# EAGLE board vykObv_pan (EAGLE 7.2.0), part 1 of 2
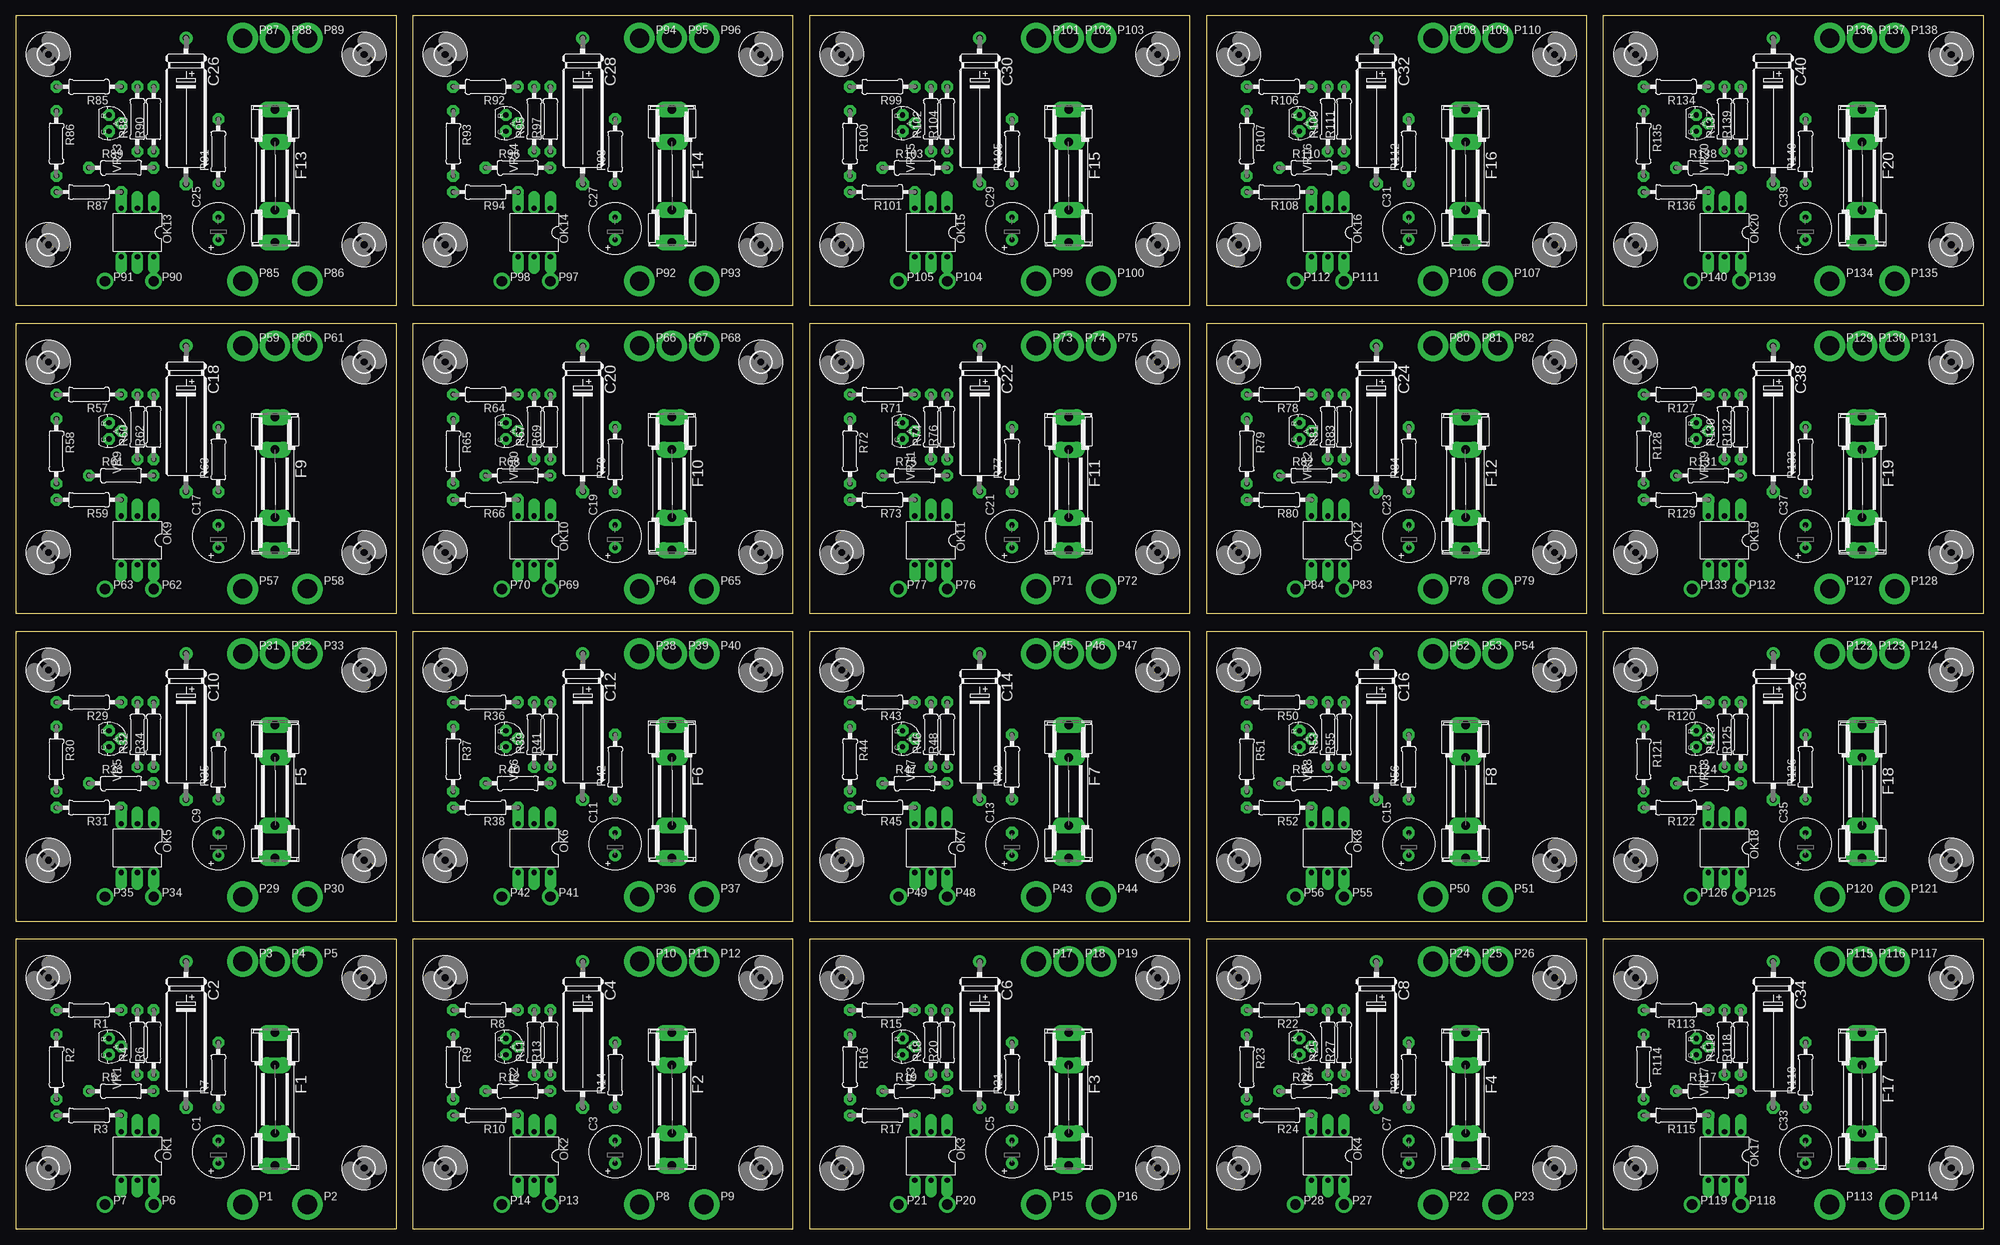
[diagram p0: board, top side]
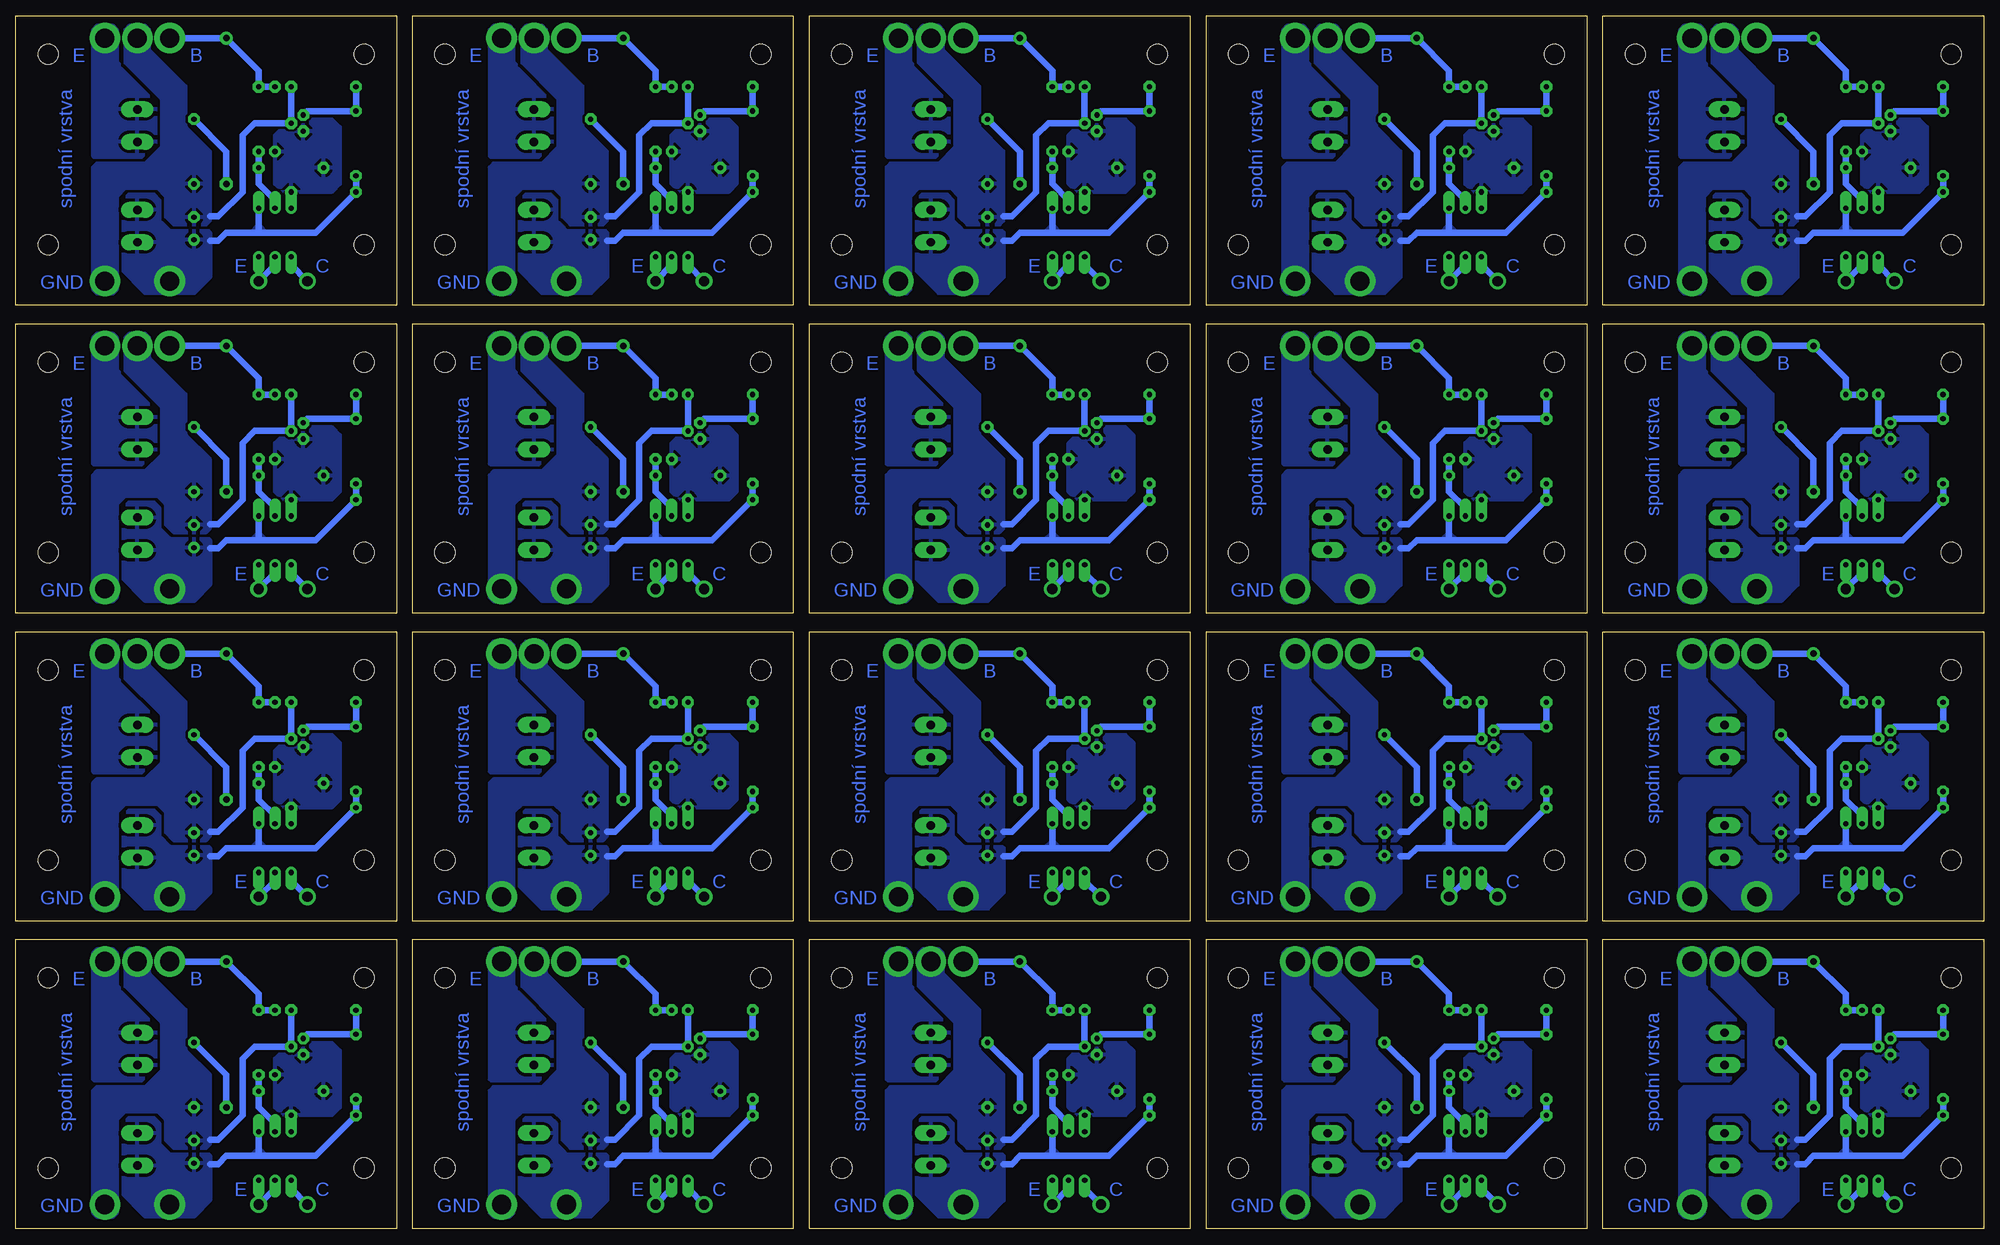
[diagram p1: board, bottom side, seen from below]

Size 308.59 x 190.17 mm. Coordinates in mm from the lower left corner, seen from the top.
Outline: 0,0 59.67,0 59.67,45.39 0,45.39 0,0
Outline: 62.23,0 121.9,0 121.9,45.39 62.23,45.39 62.23,0
Outline: 124.46,0 184.13,0 184.13,45.39 124.46,45.39 124.46,0
Outline: 186.69,0 246.36,0 246.36,45.39 186.69,45.39 186.69,0
Outline: 0,48.26 59.67,48.26 59.67,93.65 0,93.65 0,48.26
Outline: 62.23,48.26 121.9,48.26 121.9,93.65 62.23,93.65 62.23,48.26
Outline: 124.46,48.26 184.13,48.26 184.13,93.65 124.46,93.65 124.46,48.26
Outline: 186.69,48.26 246.36,48.26 246.36,93.65 186.69,93.65 186.69,48.26
Outline: 0,96.52 59.67,96.52 59.67,141.91 0,141.91 0,96.52
Outline: 62.23,96.52 121.9,96.52 121.9,141.91 62.23,141.91 62.23,96.52
Outline: 124.46,96.52 184.13,96.52 184.13,141.91 124.46,141.91 124.46,96.52
Outline: 186.69,96.52 246.36,96.52 246.36,141.91 186.69,141.91 186.69,96.52
Outline: 0,144.78 59.67,144.78 59.67,190.17 0,190.17 0,144.78
Outline: 62.23,144.78 121.9,144.78 121.9,190.17 62.23,190.17 62.23,144.78
Outline: 124.46,144.78 184.13,144.78 184.13,190.17 124.46,190.17 124.46,144.78
Outline: 186.69,144.78 246.36,144.78 246.36,190.17 186.69,190.17 186.69,144.78
Outline: 248.92,0 308.59,0 308.59,45.39 248.92,45.39 248.92,0
Outline: 248.92,48.26 308.59,48.26 308.59,93.65 248.92,93.65 248.92,48.26
Outline: 248.92,96.52 308.59,96.52 308.59,141.91 248.92,141.91 248.92,96.52
Outline: 248.92,144.78 308.59,144.78 308.59,190.17 248.92,190.17 248.92,144.78
Copper layers (1*16): Top 0.035mm / dielectric 1.5mm / Bottom 0.035mm
Design rules "designRules": minimum track width 10mil, minimum drill 24mil, track to track 16mil, track to pad 10mil, pad to pad 8mil, via to via 8mil, smd to smd 8mil, copper to edge 20mil, drill to drill 8mil, minimum pad ring 20mil, minimum via ring 8mil, stop-mask expansion 4mil, vias tented up to drill 0mil, thermal gap 20mil

## Footprints (pad centres in the part's own frame; a part is rotated, then mirrored left to right if it is on the bottom)
E3,5-8 = drill 0.813 pad 1.6: + -1.778,0 | drill 0.813 pad 1.6 octagon: - 1.778,0
E22-6 = drill 1.016: + -11.43,0 | drill 1.016 octagon: - 11.43,0
SHK20L = drill 1.321 pad 2.54 long: 1A -10.414,0; 1B -5.334,0; 2A 10.414,0; 2B 5.334,0
DIL06 = drill 0.813 offset: 1 -2.54,-3.81; 2 0,-3.81; 3 2.54,-3.81; 4 2.54,3.81; 5 0,3.81; 6 -2.54,3.81
PAD3MM = drill 3 pad 4: 1 0,0
PAD1.6MM = drill 1.6: P$1 0,0
0207/10 = drill 0.813 octagon: 1 -5.08,0; 2 5.08,0
3,2 = hole 3.2: 0,0
TO92-CLP = drill 0.813 octagon: A 0,1.905; C 1.27,0; R -1.27,0

## Placement (x,y rotation side)
C1  220M  [E3,5-8]  31.75,12.06 90 top
C2  10M  [E22-6]  26.67,30.48 270 top
C3  220M  [E3,5-8]  93.98,12.06 90 top
C4  10M  [E22-6]  88.9,30.48 270 top
C5  220M  [E3,5-8]  156.21,12.06 90 top
C6  10M  [E22-6]  151.13,30.48 270 top
C7  220M  [E3,5-8]  218.44,12.06 90 top
C8  10M  [E22-6]  213.36,30.48 270 top
C9  220M  [E3,5-8]  31.75,60.33 90 top
C10  10M  [E22-6]  26.67,78.74 270 top
C11  220M  [E3,5-8]  93.98,60.33 90 top
C12  10M  [E22-6]  88.9,78.74 270 top
C13  220M  [E3,5-8]  156.21,60.33 90 top
C14  10M  [E22-6]  151.13,78.74 270 top
C15  220M  [E3,5-8]  218.44,60.33 90 top
C16  10M  [E22-6]  213.36,78.74 270 top
C17  220M  [E3,5-8]  31.75,108.58 90 top
C18  10M  [E22-6]  26.67,127 270 top
C19  220M  [E3,5-8]  93.98,108.58 90 top
C20  10M  [E22-6]  88.9,127 270 top
C21  220M  [E3,5-8]  156.21,108.58 90 top
C22  10M  [E22-6]  151.13,127 270 top
C23  220M  [E3,5-8]  218.44,108.58 90 top
C24  10M  [E22-6]  213.36,127 270 top
C25  220M  [E3,5-8]  31.75,156.84 90 top
C26  10M  [E22-6]  26.67,175.26 270 top
C27  220M  [E3,5-8]  93.98,156.84 90 top
C28  10M  [E22-6]  88.9,175.26 270 top
C29  220M  [E3,5-8]  156.21,156.84 90 top
C30  10M  [E22-6]  151.13,175.26 270 top
C31  220M  [E3,5-8]  218.44,156.84 90 top
C32  10M  [E22-6]  213.36,175.26 270 top
C33  220M  [E3,5-8]  280.67,12.06 90 top
C34  10M  [E22-6]  275.59,30.48 270 top
C35  220M  [E3,5-8]  280.67,60.33 90 top
C36  10M  [E22-6]  275.59,78.74 270 top
C37  220M  [E3,5-8]  280.67,108.58 90 top
C38  10M  [E22-6]  275.59,127 270 top
C39  220M  [E3,5-8]  280.67,156.84 90 top
C40  10M  [E22-6]  275.59,175.26 270 top
F1  FUSESHK20L  [SHK20L]  40.64,20.32 270 top
F2  FUSESHK20L  [SHK20L]  102.87,20.32 270 top
F3  FUSESHK20L  [SHK20L]  165.1,20.32 270 top
F4  FUSESHK20L  [SHK20L]  227.33,20.32 270 top
F5  FUSESHK20L  [SHK20L]  40.64,68.58 270 top
F6  FUSESHK20L  [SHK20L]  102.87,68.58 270 top
F7  FUSESHK20L  [SHK20L]  165.1,68.58 270 top
F8  FUSESHK20L  [SHK20L]  227.33,68.58 270 top
F9  FUSESHK20L  [SHK20L]  40.64,116.84 270 top
F10  FUSESHK20L  [SHK20L]  102.87,116.84 270 top
F11  FUSESHK20L  [SHK20L]  165.1,116.84 270 top
F12  FUSESHK20L  [SHK20L]  227.33,116.84 270 top
F13  FUSESHK20L  [SHK20L]  40.64,165.1 270 top
F14  FUSESHK20L  [SHK20L]  102.87,165.1 270 top
F15  FUSESHK20L  [SHK20L]  165.1,165.1 270 top
F16  FUSESHK20L  [SHK20L]  227.33,165.1 270 top
F17  FUSESHK20L  [SHK20L]  289.56,20.32 270 top
F18  FUSESHK20L  [SHK20L]  289.56,68.58 270 top
F19  FUSESHK20L  [SHK20L]  289.56,116.84 270 top
F20  FUSESHK20L  [SHK20L]  289.56,165.1 270 top
OK1  4N35  [DIL06]  19.05,11.43 180 top
OK2  4N35  [DIL06]  81.28,11.43 180 top
OK3  4N35  [DIL06]  143.51,11.43 180 top
OK4  4N35  [DIL06]  205.74,11.43 180 top
OK5  4N35  [DIL06]  19.05,59.69 180 top
OK6  4N35  [DIL06]  81.28,59.69 180 top
OK7  4N35  [DIL06]  143.51,59.69 180 top
OK8  4N35  [DIL06]  205.74,59.69 180 top
OK9  4N35  [DIL06]  19.05,107.95 180 top
OK10  4N35  [DIL06]  81.28,107.95 180 top
OK11  4N35  [DIL06]  143.51,107.95 180 top
OK12  4N35  [DIL06]  205.74,107.95 180 top
OK13  4N35  [DIL06]  19.05,156.21 180 top
OK14  4N35  [DIL06]  81.28,156.21 180 top
OK15  4N35  [DIL06]  143.51,156.21 180 top
OK16  4N35  [DIL06]  205.74,156.21 180 top
OK17  4N35  [DIL06]  267.97,11.43 180 top
OK18  4N35  [DIL06]  267.97,59.69 180 top
OK19  4N35  [DIL06]  267.97,107.95 180 top
OK20  4N35  [DIL06]  267.97,156.21 180 top
P1  VCC  [PAD3MM]  35.56,3.81 0 top
P2  GND  [PAD3MM]  45.72,3.81 0 top
P3  B  [PAD3MM]  35.56,41.91 0 top
P4  C  [PAD3MM]  40.64,41.91 0 top
P5  E  [PAD3MM]  45.72,41.91 0 top
P6  X4  [PAD1.6MM]  21.59,3.81 0 top
P7  X3  [PAD1.6MM]  13.97,3.81 0 top
P8  VCC  [PAD3MM]  97.79,3.81 0 top
P9  GND  [PAD3MM]  107.95,3.81 0 top
P10  B  [PAD3MM]  97.79,41.91 0 top
P11  C  [PAD3MM]  102.87,41.91 0 top
P12  E  [PAD3MM]  107.95,41.91 0 top
P13  X4  [PAD1.6MM]  83.82,3.81 0 top
P14  X3  [PAD1.6MM]  76.2,3.81 0 top
P15  VCC  [PAD3MM]  160.02,3.81 0 top
P16  GND  [PAD3MM]  170.18,3.81 0 top
P17  B  [PAD3MM]  160.02,41.91 0 top
P18  C  [PAD3MM]  165.1,41.91 0 top
P19  E  [PAD3MM]  170.18,41.91 0 top
P20  X4  [PAD1.6MM]  146.05,3.81 0 top
P21  X3  [PAD1.6MM]  138.43,3.81 0 top
P22  VCC  [PAD3MM]  222.25,3.81 0 top
P23  GND  [PAD3MM]  232.41,3.81 0 top
P24  B  [PAD3MM]  222.25,41.91 0 top
P25  C  [PAD3MM]  227.33,41.91 0 top
P26  E  [PAD3MM]  232.41,41.91 0 top
P27  X4  [PAD1.6MM]  208.28,3.81 0 top
P28  X3  [PAD1.6MM]  200.66,3.81 0 top
P29  VCC  [PAD3MM]  35.56,52.07 0 top
P30  GND  [PAD3MM]  45.72,52.07 0 top
P31  B  [PAD3MM]  35.56,90.17 0 top
P32  C  [PAD3MM]  40.64,90.17 0 top
P33  E  [PAD3MM]  45.72,90.17 0 top
P34  X4  [PAD1.6MM]  21.59,52.07 0 top
P35  X3  [PAD1.6MM]  13.97,52.07 0 top
P36  VCC  [PAD3MM]  97.79,52.07 0 top
P37  GND  [PAD3MM]  107.95,52.07 0 top
P38  B  [PAD3MM]  97.79,90.17 0 top
P39  C  [PAD3MM]  102.87,90.17 0 top
P40  E  [PAD3MM]  107.95,90.17 0 top
P41  X4  [PAD1.6MM]  83.82,52.07 0 top
P42  X3  [PAD1.6MM]  76.2,52.07 0 top
P43  VCC  [PAD3MM]  160.02,52.07 0 top
P44  GND  [PAD3MM]  170.18,52.07 0 top
P45  B  [PAD3MM]  160.02,90.17 0 top
P46  C  [PAD3MM]  165.1,90.17 0 top
P47  E  [PAD3MM]  170.18,90.17 0 top
P48  X4  [PAD1.6MM]  146.05,52.07 0 top
P49  X3  [PAD1.6MM]  138.43,52.07 0 top
P50  VCC  [PAD3MM]  222.25,52.07 0 top
P51  GND  [PAD3MM]  232.41,52.07 0 top
P52  B  [PAD3MM]  222.25,90.17 0 top
P53  C  [PAD3MM]  227.33,90.17 0 top
P54  E  [PAD3MM]  232.41,90.17 0 top
P55  X4  [PAD1.6MM]  208.28,52.07 0 top
P56  X3  [PAD1.6MM]  200.66,52.07 0 top
P57  VCC  [PAD3MM]  35.56,100.33 0 top
P58  GND  [PAD3MM]  45.72,100.33 0 top
P59  B  [PAD3MM]  35.56,138.43 0 top
P60  C  [PAD3MM]  40.64,138.43 0 top
P61  E  [PAD3MM]  45.72,138.43 0 top
P62  X4  [PAD1.6MM]  21.59,100.33 0 top
P63  X3  [PAD1.6MM]  13.97,100.33 0 top
P64  VCC  [PAD3MM]  97.79,100.33 0 top
P65  GND  [PAD3MM]  107.95,100.33 0 top
P66  B  [PAD3MM]  97.79,138.43 0 top
P67  C  [PAD3MM]  102.87,138.43 0 top
P68  E  [PAD3MM]  107.95,138.43 0 top
P69  X4  [PAD1.6MM]  83.82,100.33 0 top
P70  X3  [PAD1.6MM]  76.2,100.33 0 top
P71  VCC  [PAD3MM]  160.02,100.33 0 top
P72  GND  [PAD3MM]  170.18,100.33 0 top
P73  B  [PAD3MM]  160.02,138.43 0 top
P74  C  [PAD3MM]  165.1,138.43 0 top
P75  E  [PAD3MM]  170.18,138.43 0 top
P76  X4  [PAD1.6MM]  146.05,100.33 0 top
P77  X3  [PAD1.6MM]  138.43,100.33 0 top
P78  VCC  [PAD3MM]  222.25,100.33 0 top
P79  GND  [PAD3MM]  232.41,100.33 0 top
P80  B  [PAD3MM]  222.25,138.43 0 top
P81  C  [PAD3MM]  227.33,138.43 0 top
P82  E  [PAD3MM]  232.41,138.43 0 top
P83  X4  [PAD1.6MM]  208.28,100.33 0 top
P84  X3  [PAD1.6MM]  200.66,100.33 0 top
P85  VCC  [PAD3MM]  35.56,148.59 0 top
P86  GND  [PAD3MM]  45.72,148.59 0 top
P87  B  [PAD3MM]  35.56,186.69 0 top
P88  C  [PAD3MM]  40.64,186.69 0 top
P89  E  [PAD3MM]  45.72,186.69 0 top
P90  X4  [PAD1.6MM]  21.59,148.59 0 top
P91  X3  [PAD1.6MM]  13.97,148.59 0 top
P92  VCC  [PAD3MM]  97.79,148.59 0 top
P93  GND  [PAD3MM]  107.95,148.59 0 top
P94  B  [PAD3MM]  97.79,186.69 0 top
P95  C  [PAD3MM]  102.87,186.69 0 top
P96  E  [PAD3MM]  107.95,186.69 0 top
P97  X4  [PAD1.6MM]  83.82,148.59 0 top
P98  X3  [PAD1.6MM]  76.2,148.59 0 top
P99  VCC  [PAD3MM]  160.02,148.59 0 top
P100  GND  [PAD3MM]  170.18,148.59 0 top
P101  B  [PAD3MM]  160.02,186.69 0 top
P102  C  [PAD3MM]  165.1,186.69 0 top
P103  E  [PAD3MM]  170.18,186.69 0 top
P104  X4  [PAD1.6MM]  146.05,148.59 0 top
P105  X3  [PAD1.6MM]  138.43,148.59 0 top
P106  VCC  [PAD3MM]  222.25,148.59 0 top
P107  GND  [PAD3MM]  232.41,148.59 0 top
P108  B  [PAD3MM]  222.25,186.69 0 top
P109  C  [PAD3MM]  227.33,186.69 0 top
P110  E  [PAD3MM]  232.41,186.69 0 top
P111  X4  [PAD1.6MM]  208.28,148.59 0 top
P112  X3  [PAD1.6MM]  200.66,148.59 0 top
P113  VCC  [PAD3MM]  284.48,3.81 0 top
P114  GND  [PAD3MM]  294.64,3.81 0 top
P115  B  [PAD3MM]  284.48,41.91 0 top
P116  C  [PAD3MM]  289.56,41.91 0 top
P117  E  [PAD3MM]  294.64,41.91 0 top
P118  X4  [PAD1.6MM]  270.51,3.81 0 top
P119  X3  [PAD1.6MM]  262.89,3.81 0 top
P120  VCC  [PAD3MM]  284.48,52.07 0 top
P121  GND  [PAD3MM]  294.64,52.07 0 top
P122  B  [PAD3MM]  284.48,90.17 0 top
P123  C  [PAD3MM]  289.56,90.17 0 top
P124  E  [PAD3MM]  294.64,90.17 0 top
P125  X4  [PAD1.6MM]  270.51,52.07 0 top
P126  X3  [PAD1.6MM]  262.89,52.07 0 top
P127  VCC  [PAD3MM]  284.48,100.33 0 top
P128  GND  [PAD3MM]  294.64,100.33 0 top
P129  B  [PAD3MM]  284.48,138.43 0 top
P130  C  [PAD3MM]  289.56,138.43 0 top
P131  E  [PAD3MM]  294.64,138.43 0 top
P132  X4  [PAD1.6MM]  270.51,100.33 0 top
P133  X3  [PAD1.6MM]  262.89,100.33 0 top
P134  VCC  [PAD3MM]  284.48,148.59 0 top
P135  GND  [PAD3MM]  294.64,148.59 0 top
P136  B  [PAD3MM]  284.48,186.69 0 top
P137  C  [PAD3MM]  289.56,186.69 0 top
P138  E  [PAD3MM]  294.64,186.69 0 top
P139  X4  [PAD1.6MM]  270.51,148.59 0 top
P140  X3  [PAD1.6MM]  262.89,148.59 0 top
R1  2k2  [0207/10]  11.43,34.29 180 top
R2  1k27  [0207/10]  6.35,25.4 270 top
R3  1k8  [0207/10]  11.43,17.78 180 top
R4  30R  [0207/10]  19.05,29.21 90 top
R5  665R  [0207/10]  16.51,21.59 0 top
R6  665R  [0207/10]  21.59,29.21 90 top
R7  3R9  [0207/10]  31.75,24.13 90 top
R8  2k2  [0207/10]  73.66,34.29 180 top
R9  1k27  [0207/10]  68.58,25.4 270 top
R10  1k8  [0207/10]  73.66,17.78 180 top
R11  30R  [0207/10]  81.28,29.21 90 top
R12  665R  [0207/10]  78.74,21.59 0 top
R13  665R  [0207/10]  83.82,29.21 90 top
R14  3R9  [0207/10]  93.98,24.13 90 top
R15  2k2  [0207/10]  135.89,34.29 180 top
R16  1k27  [0207/10]  130.81,25.4 270 top
R17  1k8  [0207/10]  135.89,17.78 180 top
R18  30R  [0207/10]  143.51,29.21 90 top
R19  665R  [0207/10]  140.97,21.59 0 top
R20  665R  [0207/10]  146.05,29.21 90 top
R21  3R9  [0207/10]  156.21,24.13 90 top
R22  2k2  [0207/10]  198.12,34.29 180 top
R23  1k27  [0207/10]  193.04,25.4 270 top
R24  1k8  [0207/10]  198.12,17.78 180 top
R25  30R  [0207/10]  205.74,29.21 90 top
R26  665R  [0207/10]  203.2,21.59 0 top
R27  665R  [0207/10]  208.28,29.21 90 top
R28  3R9  [0207/10]  218.44,24.13 90 top
R29  2k2  [0207/10]  11.43,82.55 180 top
R30  1k27  [0207/10]  6.35,73.66 270 top
R31  1k8  [0207/10]  11.43,66.04 180 top
R32  30R  [0207/10]  19.05,77.47 90 top
R33  665R  [0207/10]  16.51,69.85 0 top
R34  665R  [0207/10]  21.59,77.47 90 top
R35  3R9  [0207/10]  31.75,72.39 90 top
R36  2k2  [0207/10]  73.66,82.55 180 top
R37  1k27  [0207/10]  68.58,73.66 270 top
R38  1k8  [0207/10]  73.66,66.04 180 top
R39  30R  [0207/10]  81.28,77.47 90 top
R40  665R  [0207/10]  78.74,69.85 0 top
R41  665R  [0207/10]  83.82,77.47 90 top
R42  3R9  [0207/10]  93.98,72.39 90 top
R43  2k2  [0207/10]  135.89,82.55 180 top
R44  1k27  [0207/10]  130.81,73.66 270 top
R45  1k8  [0207/10]  135.89,66.04 180 top
R46  30R  [0207/10]  143.51,77.47 90 top
R47  665R  [0207/10]  140.97,69.85 0 top
R48  665R  [0207/10]  146.05,77.47 90 top
R49  3R9  [0207/10]  156.21,72.39 90 top
R50  2k2  [0207/10]  198.12,82.55 180 top
R51  1k27  [0207/10]  193.04,73.66 270 top
R52  1k8  [0207/10]  198.12,66.04 180 top
R53  30R  [0207/10]  205.74,77.47 90 top
R54  665R  [0207/10]  203.2,69.85 0 top
R55  665R  [0207/10]  208.28,77.47 90 top
R56  3R9  [0207/10]  218.44,72.39 90 top
R57  2k2  [0207/10]  11.43,130.81 180 top
R58  1k27  [0207/10]  6.35,121.92 270 top
R59  1k8  [0207/10]  11.43,114.3 180 top
R60  30R  [0207/10]  19.05,125.73 90 top
R61  665R  [0207/10]  16.51,118.11 0 top
R62  665R  [0207/10]  21.59,125.73 90 top
R63  3R9  [0207/10]  31.75,120.65 90 top
R64  2k2  [0207/10]  73.66,130.81 180 top
R65  1k27  [0207/10]  68.58,121.92 270 top
R66  1k8  [0207/10]  73.66,114.3 180 top
R67  30R  [0207/10]  81.28,125.73 90 top
R68  665R  [0207/10]  78.74,118.11 0 top
R69  665R  [0207/10]  83.82,125.73 90 top
R70  3R9  [0207/10]  93.98,120.65 90 top
R71  2k2  [0207/10]  135.89,130.81 180 top
R72  1k27  [0207/10]  130.81,121.92 270 top
R73  1k8  [0207/10]  135.89,114.3 180 top
R74  30R  [0207/10]  143.51,125.73 90 top
R75  665R  [0207/10]  140.97,118.11 0 top
R76  665R  [0207/10]  146.05,125.73 90 top
R77  3R9  [0207/10]  156.21,120.65 90 top
R78  2k2  [0207/10]  198.12,130.81 180 top
R79  1k27  [0207/10]  193.04,121.92 270 top
R80  1k8  [0207/10]  198.12,114.3 180 top
R81  30R  [0207/10]  205.74,125.73 90 top
R82  665R  [0207/10]  203.2,118.11 0 top
R83  665R  [0207/10]  208.28,125.73 90 top
R84  3R9  [0207/10]  218.44,120.65 90 top
R85  2k2  [0207/10]  11.43,179.07 180 top
R86  1k27  [0207/10]  6.35,170.18 270 top
R87  1k8  [0207/10]  11.43,162.56 180 top
R88  30R  [0207/10]  19.05,173.99 90 top
R89  665R  [0207/10]  16.51,166.37 0 top
R90  665R  [0207/10]  21.59,173.99 90 top
R91  3R9  [0207/10]  31.75,168.91 90 top
R92  2k2  [0207/10]  73.66,179.07 180 top
R93  1k27  [0207/10]  68.58,170.18 270 top
R94  1k8  [0207/10]  73.66,162.56 180 top
R95  30R  [0207/10]  81.28,173.99 90 top
R96  665R  [0207/10]  78.74,166.37 0 top
R97  665R  [0207/10]  83.82,173.99 90 top
R98  3R9  [0207/10]  93.98,168.91 90 top
R99  2k2  [0207/10]  135.89,179.07 180 top
R100  1k27  [0207/10]  130.81,170.18 270 top
R101  1k8  [0207/10]  135.89,162.56 180 top
R102  30R  [0207/10]  143.51,173.99 90 top
R103  665R  [0207/10]  140.97,166.37 0 top
R104  665R  [0207/10]  146.05,173.99 90 top
R105  3R9  [0207/10]  156.21,168.91 90 top
R106  2k2  [0207/10]  198.12,179.07 180 top
R107  1k27  [0207/10]  193.04,170.18 270 top
R108  1k8  [0207/10]  198.12,162.56 180 top
R109  30R  [0207/10]  205.74,173.99 90 top
R110  665R  [0207/10]  203.2,166.37 0 top
R111  665R  [0207/10]  208.28,173.99 90 top
R112  3R9  [0207/10]  218.44,168.91 90 top
R113  2k2  [0207/10]  260.35,34.29 180 top
R114  1k27  [0207/10]  255.27,25.4 270 top
R115  1k8  [0207/10]  260.35,17.78 180 top
R116  30R  [0207/10]  267.97,29.21 90 top
R117  665R  [0207/10]  265.43,21.59 0 top
R118  665R  [0207/10]  270.51,29.21 90 top
R119  3R9  [0207/10]  280.67,24.13 90 top
R120  2k2  [0207/10]  260.35,82.55 180 top
R121  1k27  [0207/10]  255.27,73.66 270 top
R122  1k8  [0207/10]  260.35,66.04 180 top
R123  30R  [0207/10]  267.97,77.47 90 top
R124  665R  [0207/10]  265.43,69.85 0 top
R125  665R  [0207/10]  270.51,77.47 90 top
R126  3R9  [0207/10]  280.67,72.39 90 top
R127  2k2  [0207/10]  260.35,130.81 180 top
R128  1k27  [0207/10]  255.27,121.92 270 top
R129  1k8  [0207/10]  260.35,114.3 180 top
R130  30R  [0207/10]  267.97,125.73 90 top
R131  665R  [0207/10]  265.43,118.11 0 top
R132  665R  [0207/10]  270.51,125.73 90 top
R133  3R9  [0207/10]  280.67,120.65 90 top
R134  2k2  [0207/10]  260.35,179.07 180 top
R135  1k27  [0207/10]  255.27,170.18 270 top
R136  1k8  [0207/10]  260.35,162.56 180 top
R137  30R  [0207/10]  267.97,173.99 90 top
R138  665R  [0207/10]  265.43,166.37 0 top
R139  665R  [0207/10]  270.51,173.99 90 top
R140  3R9  [0207/10]  280.67,168.91 90 top
U$1  [3,2]  5.08,9.53 0 top
U$2  [3,2]  5.08,39.37 0 top
U$3  [3,2]  54.61,9.53 0 top
U$4  [3,2]  54.61,39.37 0 top
U$5  [3,2]  67.31,9.53 0 top
U$6  [3,2]  67.31,39.37 0 top
U$7  [3,2]  116.84,9.53 0 top
U$8  [3,2]  116.84,39.37 0 top
U$9  [3,2]  129.54,9.53 0 top
U$10  [3,2]  129.54,39.37 0 top
U$11  [3,2]  179.07,9.53 0 top
U$12  [3,2]  179.07,39.37 0 top
U$13  [3,2]  191.77,9.53 0 top
U$14  [3,2]  191.77,39.37 0 top
U$15  [3,2]  241.3,9.53 0 top
U$16  [3,2]  241.3,39.37 0 top
U$17  [3,2]  5.08,57.78 0 top
U$18  [3,2]  5.08,87.63 0 top
U$19  [3,2]  54.61,57.78 0 top
U$20  [3,2]  54.61,87.63 0 top
U$21  [3,2]  67.31,57.78 0 top
U$22  [3,2]  67.31,87.63 0 top
U$23  [3,2]  116.84,57.78 0 top
U$24  [3,2]  116.84,87.63 0 top
U$25  [3,2]  129.54,57.78 0 top
U$26  [3,2]  129.54,87.63 0 top
U$27  [3,2]  179.07,57.78 0 top
U$28  [3,2]  179.07,87.63 0 top
U$29  [3,2]  191.77,57.78 0 top
U$30  [3,2]  191.77,87.63 0 top
U$31  [3,2]  241.3,57.78 0 top
U$32  [3,2]  241.3,87.63 0 top
U$33  [3,2]  5.08,106.05 0 top
U$34  [3,2]  5.08,135.89 0 top
U$35  [3,2]  54.61,106.05 0 top
U$36  [3,2]  54.61,135.89 0 top
U$37  [3,2]  67.31,106.05 0 top
U$38  [3,2]  67.31,135.89 0 top
U$39  [3,2]  116.84,106.05 0 top
U$40  [3,2]  116.84,135.89 0 top
U$41  [3,2]  129.54,106.05 0 top
U$42  [3,2]  129.54,135.89 0 top
U$43  [3,2]  179.07,106.05 0 top
U$44  [3,2]  179.07,135.89 0 top
U$45  [3,2]  191.77,106.05 0 top
U$46  [3,2]  191.77,135.89 0 top
U$47  [3,2]  241.3,106.05 0 top
U$48  [3,2]  241.3,135.89 0 top
U$49  [3,2]  5.08,154.31 0 top
U$50  [3,2]  5.08,184.15 0 top
U$51  [3,2]  54.61,154.31 0 top
U$52  [3,2]  54.61,184.15 0 top
U$53  [3,2]  67.31,154.31 0 top
U$54  [3,2]  67.31,184.15 0 top
U$55  [3,2]  116.84,154.31 0 top
U$56  [3,2]  116.84,184.15 0 top
U$57  [3,2]  129.54,154.31 0 top
U$58  [3,2]  129.54,184.15 0 top
U$59  [3,2]  179.07,154.31 0 top
U$60  [3,2]  179.07,184.15 0 top
U$61  [3,2]  191.77,154.31 0 top
U$62  [3,2]  191.77,184.15 0 top
U$63  [3,2]  241.3,154.31 0 top
U$64  [3,2]  241.3,184.15 0 top
U$65  [3,2]  254,9.53 0 top
U$66  [3,2]  254,39.37 0 top
U$67  [3,2]  303.53,9.53 0 top
U$68  [3,2]  303.53,39.37 0 top
U$69  [3,2]  254,57.78 0 top
U$70  [3,2]  254,87.63 0 top
U$71  [3,2]  303.53,57.78 0 top
U$72  [3,2]  303.53,87.63 0 top
U$73  [3,2]  254,106.05 0 top
U$74  [3,2]  254,135.89 0 top
U$75  [3,2]  303.53,106.05 0 top
U$76  [3,2]  303.53,135.89 0 top
U$77  [3,2]  254,154.31 0 top
U$78  [3,2]  254,184.15 0 top
U$79  [3,2]  303.53,154.31 0 top
U$80  [3,2]  303.53,184.15 0 top
VR1  [TO92-CLP]  14.61,28.57 270 top
VR2  [TO92-CLP]  76.83,28.57 270 top
VR3  [TO92-CLP]  139.06,28.57 270 top
VR4  [TO92-CLP]  201.29,28.57 270 top
VR5  [TO92-CLP]  14.61,76.83 270 top
VR6  [TO92-CLP]  76.83,76.83 270 top
VR7  [TO92-CLP]  139.06,76.83 270 top
VR8  [TO92-CLP]  201.29,76.83 270 top
VR9  [TO92-CLP]  14.61,125.09 270 top
VR10  [TO92-CLP]  76.83,125.09 270 top
VR11  [TO92-CLP]  139.06,125.09 270 top
VR12  [TO92-CLP]  201.29,125.09 270 top
VR13  [TO92-CLP]  14.61,173.35 270 top
VR14  [TO92-CLP]  76.83,173.35 270 top
VR15  [TO92-CLP]  139.06,173.35 270 top
VR16  [TO92-CLP]  201.29,173.35 270 top
VR17  [TO92-CLP]  263.52,28.57 270 top
VR18  [TO92-CLP]  263.52,76.83 270 top
VR19  [TO92-CLP]  263.52,125.09 270 top
VR20  [TO92-CLP]  263.52,173.35 270 top

## Library data of the parts
C1-C40 R1-R140 = rcl
F1-F20 = fuse; OC_FARNELL: unknown; OC_NEWARK: unknown
OK1-OK20 = optocoupler; MF: FAIRCHILD SEMICONDUCTOR; MPN: 4N35; OC_FARNELL: 1328375; OC_NEWARK: 72K9946
P1-P5 P8-P12 P15-P19 P22-P26 P29-P33 P36-P40 P43-P47 P50-P54 P57-P61 P64-P68 P71-P75 P78-P82 P85-P89 P92-P96 P99-P103 P106-P110 P113-P117 P120-P124 P127-P131 P134-P138 = PADs; DIAMETER: 3mm
P6 P7 P13 P14 P20 P21 P27 P28 P34 P35 P41 P42 P48 P49 P55 P56 P62 P63 P69 P70 P76 P77 P83 P84 P90 P91 P97 P98 P104 P105 P111 P112 P118 P119 P125 P126 P132 P133 P139 P140 = PADs
U$1-U$80 = holes
VR1-VR20 = v-reg

## Nets
EMIT: F1.1A F1.1B P5.1
EMIT1: F2.1A F2.1B P12.1
EMIT2: F3.1A F3.1B P19.1
EMIT3: F4.1A F4.1B P26.1
EMIT4: F5.1A F5.1B P33.1
EMIT5: F6.1A F6.1B P40.1
EMIT6: F7.1A F7.1B P47.1
EMIT7: F8.1A F8.1B P54.1
EMIT8: F9.1A F9.1B P61.1
EMIT9: F10.1A F10.1B P68.1
EMIT10: F11.1A F11.1B P75.1
EMIT11: F12.1A F12.1B P82.1
EMIT12: F13.1A F13.1B P89.1
EMIT13: F14.1A F14.1B P96.1
EMIT14: F15.1A F15.1B P103.1
EMIT15: F16.1A F16.1B P110.1
EMIT16: F17.1A F17.1B P117.1
EMIT17: F18.1A F18.1B P124.1
EMIT18: F19.1A F19.1B P131.1
EMIT19: F20.1A F20.1B P138.1
GND: C1.- P2.1 P4.1 R1.1 R7.1 VR1.A
GND1: C3.- P9.1 P11.1 R8.1 R14.1 VR2.A
GND2: C5.- P16.1 P18.1 R15.1 R21.1 VR3.A
GND3: C7.- P23.1 P25.1 R22.1 R28.1 VR4.A
GND4: C9.- P30.1 P32.1 R29.1 R35.1 VR5.A
GND5: C11.- P37.1 P39.1 R36.1 R42.1 VR6.A
GND6: C13.- P44.1 P46.1 R43.1 R49.1 VR7.A
GND7: C15.- P51.1 P53.1 R50.1 R56.1 VR8.A
GND8: C17.- P58.1 P60.1 R57.1 R63.1 VR9.A
GND9: C19.- P65.1 P67.1 R64.1 R70.1 VR10.A
GND10: C21.- P72.1 P74.1 R71.1 R77.1 VR11.A
GND11: C23.- P79.1 P81.1 R78.1 R84.1 VR12.A
GND12: C25.- P86.1 P88.1 R85.1 R91.1 VR13.A
GND13: C27.- P93.1 P95.1 R92.1 R98.1 VR14.A
GND14: C29.- P100.1 P102.1 R99.1 R105.1 VR15.A
GND15: C31.- P107.1 P109.1 R106.1 R112.1 VR16.A
GND16: C33.- P114.1 P116.1 R113.1 R119.1 VR17.A
GND17: C35.- P121.1 P123.1 R120.1 R126.1 VR18.A
GND18: C37.- P128.1 P130.1 R127.1 R133.1 VR19.A
GND19: C39.- P135.1 P137.1 R134.1 R140.1 VR20.A
N$1: OK2.2 R12.2 R13.1
N$2: C4.+ P10.1 R11.2 R13.2
N$3: R10.1 R11.1 R12.1 VR2.C
N$4: OK2.4 P14.P$1
N$5: OK1.2 R5.2 R6.1
N$6: C2.+ P3.1 R4.2 R6.2
N$7: R3.1 R4.1 R5.1 VR1.C
N$8: OK1.4 P7.P$1
N$9: OK1.5 P6.P$1
N$10: OK2.5 P13.P$1
N$11: R1.2 R2.1 VR1.R
N$12: R8.2 R9.1 VR2.R
N$13: C2.- R7.2
N$14: C4.- R14.2
N$15: OK3.2 R19.2 R20.1
N$16: C6.+ P17.1 R18.2 R20.2
N$17: R17.1 R18.1 R19.1 VR3.C
N$18: OK3.4 P21.P$1
N$19: OK3.5 P20.P$1
N$20: R15.2 R16.1 VR3.R
N$21: C6.- R21.2
N$22: OK4.2 R26.2 R27.1
N$23: C8.+ P24.1 R25.2 R27.2
N$24: R24.1 R25.1 R26.1 VR4.C
N$25: OK4.4 P28.P$1
N$26: OK4.5 P27.P$1
N$27: R22.2 R23.1 VR4.R
N$28: C8.- R28.2
N$29: OK5.2 R33.2 R34.1
N$30: C10.+ P31.1 R32.2 R34.2
N$31: R31.1 R32.1 R33.1 VR5.C
N$32: OK5.4 P35.P$1
N$33: OK5.5 P34.P$1
N$34: R29.2 R30.1 VR5.R
N$35: C10.- R35.2
N$36: OK6.2 R40.2 R41.1
N$37: C12.+ P38.1 R39.2 R41.2
N$38: R38.1 R39.1 R40.1 VR6.C
N$39: OK6.4 P42.P$1
N$40: OK6.5 P41.P$1
N$41: R36.2 R37.1 VR6.R
N$42: C12.- R42.2
N$43: OK7.2 R47.2 R48.1
N$44: C14.+ P45.1 R46.2 R48.2
N$45: R45.1 R46.1 R47.1 VR7.C
N$46: OK7.4 P49.P$1
N$47: OK7.5 P48.P$1
N$48: R43.2 R44.1 VR7.R
N$49: C14.- R49.2
N$50: OK8.2 R54.2 R55.1
N$51: C16.+ P52.1 R53.2 R55.2
N$52: R52.1 R53.1 R54.1 VR8.C
N$53: OK8.4 P56.P$1
N$54: OK8.5 P55.P$1
N$55: R50.2 R51.1 VR8.R
N$56: C16.- R56.2
N$57: OK9.2 R61.2 R62.1
N$58: C18.+ P59.1 R60.2 R62.2
N$59: R59.1 R60.1 R61.1 VR9.C
N$60: OK9.4 P63.P$1
N$61: OK9.5 P62.P$1
N$62: R57.2 R58.1 VR9.R
N$63: C18.- R63.2
N$64: OK10.2 R68.2 R69.1
N$65: C20.+ P66.1 R67.2 R69.2
N$66: R66.1 R67.1 R68.1 VR10.C
N$67: OK10.4 P70.P$1
N$68: OK10.5 P69.P$1
N$69: R64.2 R65.1 VR10.R
N$70: C20.- R70.2
N$71: OK11.2 R75.2 R76.1
N$72: C22.+ P73.1 R74.2 R76.2
N$73: R73.1 R74.1 R75.1 VR11.C
N$74: OK11.4 P77.P$1
N$75: OK11.5 P76.P$1
N$76: R71.2 R72.1 VR11.R
N$77: C22.- R77.2
N$78: OK12.2 R82.2 R83.1
N$79: C24.+ P80.1 R81.2 R83.2
N$80: R80.1 R81.1 R82.1 VR12.C
N$81: OK12.4 P84.P$1
N$82: OK12.5 P83.P$1
N$83: R78.2 R79.1 VR12.R
N$84: C24.- R84.2
N$85: OK13.2 R89.2 R90.1
N$86: C26.+ P87.1 R88.2 R90.2
N$87: R87.1 R88.1 R89.1 VR13.C
N$88: OK13.4 P91.P$1
N$89: OK13.5 P90.P$1
N$90: R85.2 R86.1 VR13.R
N$91: C26.- R91.2
N$92: OK14.2 R96.2 R97.1
N$93: C28.+ P94.1 R95.2 R97.2
N$94: R94.1 R95.1 R96.1 VR14.C
N$95: OK14.4 P98.P$1
N$96: OK14.5 P97.P$1
N$97: R92.2 R93.1 VR14.R
N$98: C28.- R98.2
N$99: OK15.2 R103.2 R104.1
N$100: C30.+ P101.1 R102.2 R104.2
N$101: R101.1 R102.1 R103.1 VR15.C
N$102: OK15.4 P105.P$1
N$103: OK15.5 P104.P$1
N$104: R99.2 R100.1 VR15.R
N$105: C30.- R105.2
N$106: OK16.2 R110.2 R111.1
N$107: C32.+ P108.1 R109.2 R111.2
N$108: R108.1 R109.1 R110.1 VR16.C
N$109: OK16.4 P112.P$1
N$110: OK16.5 P111.P$1
N$111: R106.2 R107.1 VR16.R
N$112: C32.- R112.2
N$113: OK17.2 R117.2 R118.1
N$114: C34.+ P115.1 R116.2 R118.2
N$115: R115.1 R116.1 R117.1 VR17.C
N$116: OK17.4 P119.P$1
N$117: OK17.5 P118.P$1
N$118: R113.2 R114.1 VR17.R
N$119: C34.- R119.2
N$120: OK18.2 R124.2 R125.1
N$121: C36.+ P122.1 R123.2 R125.2
N$122: R122.1 R123.1 R124.1 VR18.C
N$123: OK18.4 P126.P$1
N$124: OK18.5 P125.P$1
N$125: R120.2 R121.1 VR18.R
N$126: C36.- R126.2
N$127: OK19.2 R131.2 R132.1
N$128: C38.+ P129.1 R130.2 R132.2
N$129: R129.1 R130.1 R131.1 VR19.C
N$130: OK19.4 P133.P$1
N$131: OK19.5 P132.P$1
N$132: R127.2 R128.1 VR19.R
N$133: C38.- R133.2
N$134: OK20.2 R138.2 R139.1
N$135: C40.+ P136.1 R137.2 R139.2
N$136: R136.1 R137.1 R138.1 VR20.C
N$137: OK20.4 P140.P$1
N$138: OK20.5 P139.P$1
N$139: R134.2 R135.1 VR20.R
N$140: C40.- R140.2
VDD: C1.+ F1.2A F1.2B OK1.1 P1.1 R2.2 R3.2
VDD1: C3.+ F2.2A F2.2B OK2.1 P8.1 R9.2 R10.2
VDD2: C5.+ F3.2A F3.2B OK3.1 P15.1 R16.2 R17.2
VDD3: C7.+ F4.2A F4.2B OK4.1 P22.1 R23.2 R24.2
VDD4: C9.+ F5.2A F5.2B OK5.1 P29.1 R30.2 R31.2
VDD5: C11.+ F6.2A F6.2B OK6.1 P36.1 R37.2 R38.2
VDD6: C13.+ F7.2A F7.2B OK7.1 P43.1 R44.2 R45.2
VDD7: C15.+ F8.2A F8.2B OK8.1 P50.1 R51.2 R52.2
VDD8: C17.+ F9.2A F9.2B OK9.1 P57.1 R58.2 R59.2
VDD9: C19.+ F10.2A F10.2B OK10.1 P64.1 R65.2 R66.2
VDD10: C21.+ F11.2A F11.2B OK11.1 P71.1 R72.2 R73.2
VDD11: C23.+ F12.2A F12.2B OK12.1 P78.1 R79.2 R80.2
VDD12: C25.+ F13.2A F13.2B OK13.1 P85.1 R86.2 R87.2
VDD13: C27.+ F14.2A F14.2B OK14.1 P92.1 R93.2 R94.2
VDD14: C29.+ F15.2A F15.2B OK15.1 P99.1 R100.2 R101.2
VDD15: C31.+ F16.2A F16.2B OK16.1 P106.1 R107.2 R108.2
VDD16: C33.+ F17.2A F17.2B OK17.1 P113.1 R114.2 R115.2
VDD17: C35.+ F18.2A F18.2B OK18.1 P120.1 R121.2 R122.2
VDD18: C37.+ F19.2A F19.2B OK19.1 P127.1 R128.2 R129.2
VDD19: C39.+ F20.2A F20.2B OK20.1 P134.1 R135.2 R136.2